# Altium PCB UIXO_sensor_shield.PcbDoc
Units mil, origin at the board's own origin, x right, y up, seen from the top; angles counter-clockwise.
Board outline 6000 x 4000 mil, 2 copper layers (Top Layer, Bottom Layer); 36 components, 25 nets, 112 pads, 24 vias.
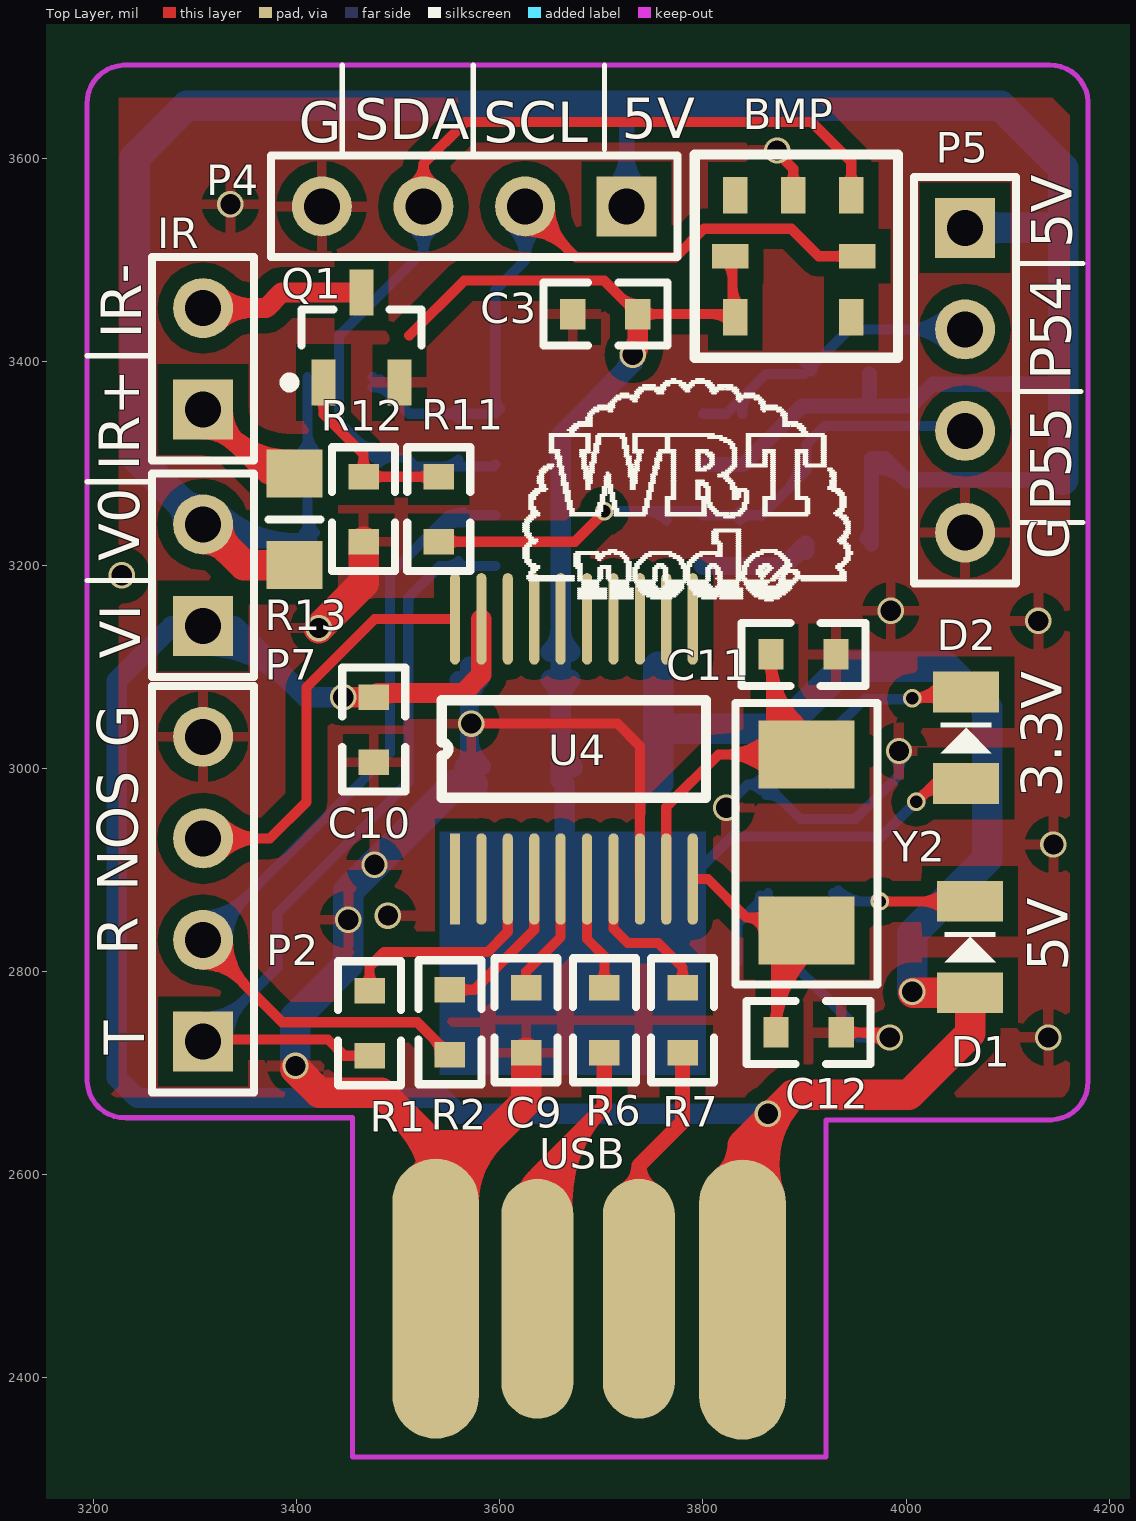
[diagram p0: Top Layer view]
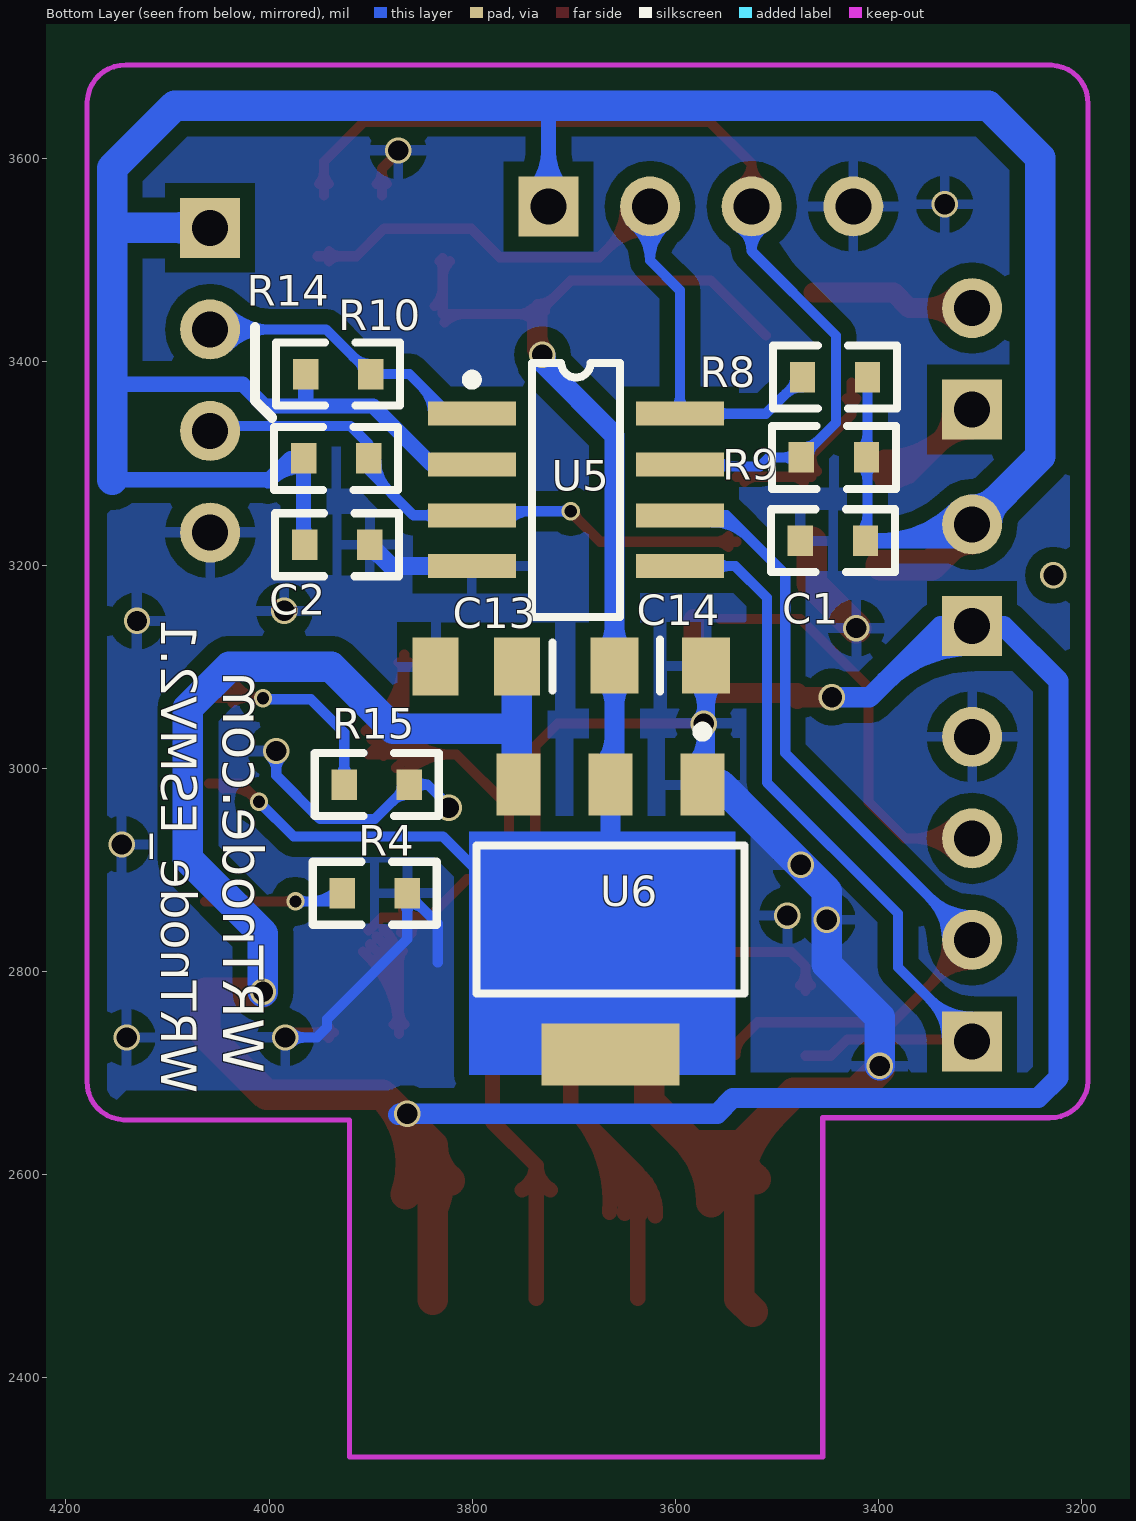
[diagram p1: Bottom Layer view, seen from below]
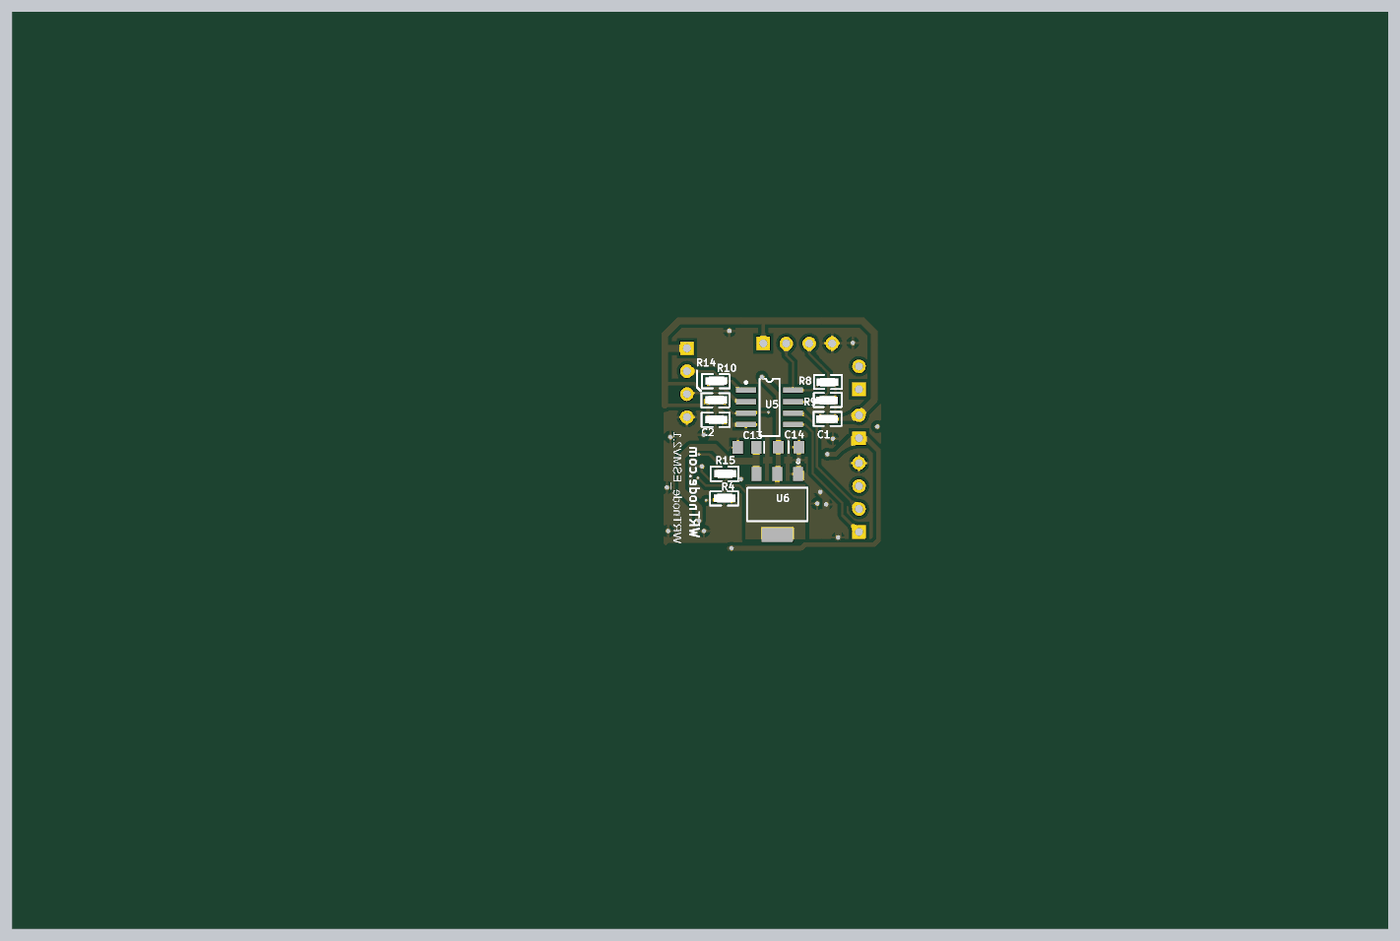
[diagram p2: 3D render of the assembled board from below, using the file's embedded part models]

## Layer stack, top to bottom
Top Layer: signal copper 1.4
Dielectric: dielectric 12.6, FR-4, Dk 4.8
Bottom Layer: signal copper 1.4

## Board outline
1000,1000 7000,1000 7000,5000 1000,5000

## Design rules (kind name [scope] priority, off if disabled: settings)
Clearance [All] p1: gap=15
PolygonConnect [All] p1: connectstyle=Relief reliefconductorwidth=10 reliefentries=4 polygonreliefangle="90 Angle"
RoutingVias [All] p1: holewidth=20 width=30 viastyle="Through Hole" minholewidth=10 minwidth=10 maxholewidth=30 maxwidth=50
SilkscreenOverComponentPads [All] p1: minsilkscreentomaskgap=10
SolderMaskExpansion [All] p1: expansion=4
Width [All] p1: maxlimit=59 minlimit=2 preferedwidth=10
27 further rules are at their usual default settings.

## Components (designator, comment, footprint, x,y, rotation, side; value= is the part's Value field where it differs from the comment)
BMP "BMP180" BMP180 3832,3564 r0 top
C1 "Cap" C0603 3450,3228 r180 bottom
C2 "Cap" C0603 3928,3216 r0 bottom
C3 "Cap" C0603 3699,3451 r0 top
C9 "Cap" C0603 3622,2747 r90 top
C10 "Cap" C0603 3472,3033 r90 top
C11 "Cap" C0603 3904,3108 r180 top
C12 "Cap" C0603 3909,2736 r180 top
C13 "Cap" CAP0805(2512) 3796,3100 r0 bottom
C14 "Cap" RES0805(2012M) 3615,3101 r180 bottom
D1 "LED" LED_0805 4063,2824 r270 top
D2 "LED" LED_0805 4059,3030 r270 top
IR "IRLED" HDR1X2 3308,3353 r90 top
P2 "Header 4" HDR1X4 3308,2731 r90 top
P4 "IIC" HDR1X4 3725,3553 r180 top
P5 "DHT11" HDR1X4 4058,3532 r270 top
P7 "Header 2" HDR1X2 3308,3140 r90 top
Q1 "NPN" SOT95P240-3N 3464,3424 r90 top
R1 "Res Semi" C0603 3468,2744 r90 top
R2 "Res Semi" C0603 3547,2745 r90 top
R4 "Res Semi" C0603 3891,2873 r0 bottom
R6 "Res Semi" C0603 3699,2747 r90 top
R7 "Res Semi" C0603 3776,2747 r90 top
R8 "Res1" C0603 3448,3389 r180 bottom
R9 "Res1" C0603 3449,3310 r180 bottom
R10 "Res1" C0603 3927,3384 r0 bottom
R11 "Res1" C0603 3544,3260 r270 top
R12 "Res1" C0603 3470,3260 r270 top
R13 "Res1" RES0805(2012M) 3398,3245 r90 top
R14 "Res1" C0603 3929,3301 r0 bottom
R15 "Res Semi" C0603 3889,2980 r0 bottom
U4 "CH340T" SOP20 3556,2891 r90 top
U5 "STC15W204S" SOP8 3698,3274 r270 bottom
U6 "REG1117-3.3" ZZ311 3664,2851 r0 bottom
USB "USB" USB-JSZ 3777,2478 r180 top
Y2 "XTAL" XTAL-5032 3901,2930 r270 top

## Footprints (in the part's own frame and the unit in brackets; to place one, negate y for a bottom-side part, rotate by r counter-clockwise, add the part's x,y. Pads: shape width x height; smd on the part's side, far side on the other; paste and mask are expansions set on the pad)
BMP180 [mil]
  rect 24x36 smd: 1(0,0) 3(0,-120) 4(114,-120) 6(114,0) 7(57,0)
  rect 36x24 smd: 2(-5,-60) 5(120,-60)
  silkscreen extent -40,-160 160,40
C0603 [mil]
  rect 25x30 smd: 1(-27,-4) 2(37,-4)
  silkscreen extent -56,-35 66,27, body extent -45,-24 49,13, height 30
CAP0805(2512) [mm]
  rect 1.15x1.45 smd: 1(-1.016,0) 2(1.016,0)
  silkscreen extent -1.9,-0.6 -1.9,0.6, body extent -1.07,-0.7 1.07,0.7, height 1.1
HDR1X2 [mm] "Connector; Header; 2 Position"
  rect 1.5x1.5 hole 0.9: 1(0,0)
  round 1.5 hole 0.9: 2(2.54,0)
  silkscreen extent -1.27,-1.27 3.81,1.27
HDR1X4 [mm] "Connector; Header; 4 Position"
  rect 1.5x1.5 hole 0.9: 1(0,0)
  round 1.5 hole 0.9: 2(2.54,0) 3(5.08,0) 4(7.62,0)
  silkscreen extent -1.27,-1.27 8.89,1.27
LED_0805 [mil]
  rect 40x65 smd: 1(45,0) 2(-45,0)
  silkscreen extent -15,-25 15,25, body extent -45,-34 45,34, height 60
RES0805(2012M) [mm]
  rect 1.2x1.4 smd: 1(-1.143,0) 2(1.143,0)
  silkscreen extent 0,-0.65 0,0.65, body extent -1.07,-0.7 1.07,0.7, height 0.65
SOP8 [mm] "Small Outline; 8 Leads; Body Width 4.3 mm; Pitch 1.27 mm"
  rect 0.6x2.2 smd: 1(-1.905,-2.6) 2(-0.635,-2.6) 3(0.635,-2.6) 4(1.905,-2.6) 5(1.905,2.6) 6(0.635,2.6) 7(-0.635,2.6) 8(-1.905,2.6)
  silkscreen extent -3.18,-2.72 3.18,1.1
SOP20 [mil]
  rect 90x10 smd: 1(0,0)
  oval 90x10 smd: 2(0,-26) 3(0,-52) 4(0,-78) 5(0,-104) 6(0,-130) 7(0,-156) 8(0,-182) 9(0,-208) 10(0,-234) 11(256,-234) 12(256,-208) 13(256,-182) 14(256,-156) 15(256,-130) 16(256,-104) 17(256,-78) 18(256,-52) 19(256,-26) 20(256,0)
  silkscreen extent 80,-247 176,13
SOT95P240-3N [mm] "SOT23, 3-Leads, Body 2.9x1.3mm, Pitch 0.95mm, Lead Span 2.4mm, IPC Medium Density"
  rect 1.15x0.6 smd: 1(-1.125,0.95) 2(-1.125,-0.95) 3(1.125,0)
  silkscreen extent -1.25,-1.5 0.7,1.92, body extent -0.7,-1.5 0.7,1.5, height 1.14
USB-JSZ [mm]
  oval 2.17x7 smd: 1(-1.575,0.025) 4(6.096,0)
  oval 1.8x6 smd: 2(1.016,0) 3(3.556,0)
XTAL-5032 [mm]
  rect 1.7x2.4 smd: 1(-2.124,0.025) 2(2.276,0.025)
  silkscreen extent -3.4,-1.75 3.63,1.8, body extent -2.42,-1.45 2.58,1.55, height 1.5
ZZ311 [mm] "SOT-223/SC-73; 4 Leads; Body 6.7 x 7.3 mm, inc. leads (LxW max)"
  rect 1.1x1.55 smd: 1(-2.3,-3.375) 2(0,-3.375) 3(2.3,-3.375)
  rect 3.45x1.55 smd: 4(0,3.375)
  silkscreen extent -3.35,-4.82 3.35,1.85

## Part data
BMP: library part "Header 7", "Header, 7-Pin"
C1 C2 C3 C9 C10 C11 C12 C13 C14: "Capacitor"
D1 D2: library part LED3, "Typical BLUE SiC LED"
IR: library part "Header 2", "Header, 2-Pin"
P2: "Header, 4-Pin"
P4 P5: library part "Header 4", "Header, 4-Pin"
P7: "Header, 2-Pin"
Q1: "NPN Bipolar Transistor"
R1 R2 R4 R6 R7 R15: "Semiconductor Resistor"
R8 R9 R10 R11 R12 R13 R14: "Resistor"
U4: library part CH340
U5: library part stc15f204s_sop8
U6: "800mA and 1A Low Dropout Positive Regulator 2.85V, 3.3V, 5V, and Adjustable"
Y2: "Crystal Oscillator"

## Via types
v1: diameter 26, hole 20, Top Layer to Bottom Layer, tented both sides, 20 vias
v2: diameter 18, hole 12, Top Layer to Bottom Layer, tented both sides, 4 vias

## Nets (pads, with @x,y where several pads share a name; then routed paths per layer and width w, separated by ;. In a path a pad name is that pad's centre, name@x,y a point inside that pad or via, vN(x,y) a via of type N, cw(c..) or ccw(c..) an arc to the next point about the centre after c; other vN are vias at no path point)
D3.3V: BMP.2 BMP.3 C3.2 C14.1 D2.1 U6.2 U6.4 | length 1938.6
  Top Layer w10: 3511,3426 3565,3480 3703,3480 C3.2 3829,3447 BMP.2@3829,3502 ; 3718.93,3464.07 ccw(c3736,3481.14) C3.2@3736,3457 ; C3.2@3724.96,3458.04 cw(c3716.43,3449.5) C3.2@3728.5,3449.5 ; v1(3731,3407) v1@3736,3412 ; C3.2@3741.3,3441.7 cw(c3754.11,3428.89) 3754.11,3447 cw(c3754.11,3465.11) C3.2@3741.3,3452.3 ; 3807.86,3447 cw(c3807.86,3419.86) BMP.3@3827.05,3439.05 ; BMP.2@3822.05,3499.05 cw(c3805.27,3482.27) 3829,3482.27 ; 3829,3474.14 ccw(c3856.14,3474.14) BMP.3@3836.95,3454.95 ; 3829,3491.93 cw(c3839.07,3491.93) BMP.2@3831.95,3499.05 ; v2(4010,2967) 4028,2985 D2.1 ; v2@4010,2971 ccw(c4010,2980.66) 4016.83,2973.83 ccw(c4023.66,2967) v2@4014,2967 ; v2@4013.75,2970.75 cw(c4038.2,2946.29) D2.1@4045.45,2980.11
  Top Layer w20: v1@3728.88,3409.12 ccw(c3711.69,3426.31) 3736,3426.31 ; v1@3736,3412 C3.2
  Bottom Layer w10: 3664,2902 3798,2902 3829,2933 3976,2933 v2(4010,2967)
  Bottom Layer w20: C14.1@3650.37,3087.43 cw(c3627.11,3064.18) 3660,3064.18 cw(c3692.89,3064.18) C14.1@3669.63,3087.43 ; C14.1@3650.37,3114.57 ccw(c3627.11,3137.82) 3660,3137.82 ccw(c3692.89,3137.82) C14.1@3669.63,3114.57 ; U6.2@3660,2987.87 C14.1 3660,3328 v1@3731,3399 ; 3660,3030.52 ccw(c3701.79,3030.52) U6.2@3672.24,3000.97 ; U6.4 3664,2902 U6.2 ; 3720.22,3388.22 ccw(c3701.44,3407) v1@3728,3407
D+: R6.2 U4.6 | length 142.5
  Top Layer w10: U4.6 3686,2832 3703,2815 R6.2 ; R6.2@3697.7,2789.3 ccw(c3684.89,2802.11) 3703,2802.11 ccw(c3721.11,2802.11) R6.2@3708.3,2789.3
D-: R7.2 U4.7 | length 181.2
  Top Layer w10: U4.7 3712,2842 3726,2828 3756,2828 3780,2804 R7.2 ; R7.2@3774.7,2789.3 ccw(c3761.89,2802.11) 3780,2802.11 ccw(c3798.11,2802.11) R7.2@3785.3,2789.3
DATA: P5.2 R10.1 U5.1 | length 498.3
  Bottom Layer w10: U5.1 3823,3349 3862,3388 R10.1 3944,3432 P5.2 ; U5.1@3838.67,3349 cw(c3876.5,3349) 3849.75,3375.75 ; R10.1@3900,3398 ccw(c3900,3422.14) 3917.07,3405.07 ; R10.1@3907.5,3390.5 cw(c3919.57,3390.5) R10.1@3911.04,3399.04 ; P5.2@4040.66,3414.66 ccw(c3998.79,3372.79) 3998.79,3432 ccw(c3998.79,3491.21) P5.2@4040.66,3449.34 ; P5.2@4047.73,3421.73 ccw(c4022.93,3396.93) 4022.93,3432 ccw(c4022.93,3467.07) P5.2@4047.73,3442.27
GND: BMP.7 C1.1 C2.1 C3.1 C9.1 C10.1 C11.1 C12.1 C13.2 C14.2 P2.4 P4.4 P5.4 Q1.2 R4.1 R12.2 R15.1 U4.8 U5.4 U6.1 USB.4 | length 2845.9
  Top Layer w10: v1@3566,3044 v1(3572,3044) 3716,3044 3738,3022 U4.8 ; v1@3873,3606 3889,3590 BMP.7 ; BMP.7@3884.05,3574.95 ccw(c3872.1,3586.9) 3889,3586.9 ccw(c3905.9,3586.9) BMP.7@3893.95,3574.95 ; C12.1 3979,2740 v1(3984,2735) ; C12.1@3941.3,2734.7 cw(c3954.11,2721.89) 3954.11,2740 cw(c3954.11,2758.11) C12.1@3941.3,2745.3 ; 3952.62,2740 cw(c3952.62,2703.62) v1@3978.34,2729.34
  Top Layer w30: v1@3399,2704 3422.5,2680.5 3483.5,2680.5 3537,2627 ; v1(3422,3138) 3466,3182 R12.2 ; 3505.49,2658.51 cw(c3423.75,2576.77) USB.4@3539.28,2573 ; USB.4@3520.87,2595.62 ccw(c3498.41,2627) 3537,2627 ; USB.4@3524,2465 USB.4 USB.4@3537,2583 ; USB.4@3537,2600.8 ccw(c3537,2643.76) 3567.38,2613.38 ; 3539.5,2629 3577,2629 ; USB.4@3553.13,2595.62 cw(c3575.59,2627) 3537,2627 ; USB.4@3564.72,2573.08 cw(c3655.58,2573.08) 3591.33,2637.33 ; C9.1 3626,2672 USB.4@3537,2583 ; USB.4@3537,2583 3537,2627
  Bottom Layer w10: v1@3823,2963 3844,2984 ; 3834,2809 3834,2847 R4.1 3864,2832 3943,2753 3943,2745 3953,2735 v1(3984,2735) ; 3846.93,2859.93 cw(c3864,2842.86) R4.1@3864,2867 ; R4.1@3852.96,2865.96 ccw(c3844.43,2874.5) R4.1@3856.5,2874.5 ; R15.1@3856.67,2978.72 ccw(c3844,2966.15) 3844,2984 ; R15.1@3856.67,2989.28 cw(c3844,3001.85) 3844,2984 ; R4.1@3858.7,2869.2 cw(c3845.89,2856.39) 3864,2856.39 cw(c3882.11,2856.39) R4.1@3869.3,2869.2 ; R15.1@3862,2974 cw(c3862,2949.86) 3879.07,2966.93 ; R15.1@3869.5,2981.5 ccw(c3881.57,2981.5) R15.1@3873.04,2972.96 ; v1@3978.34,2729.34 ccw(c3964.69,2715.69) 3964.69,2735 ccw(c3964.69,2754.31) v1@3978.34,2740.66 ; v1@3987.34,3011.34 cw(c3973.69,2997.69) 3993,2997.69 cw(c4012.31,2997.69) v1@3998.66,3011.34 ; v1(3993,3017) 3993,2992.99 3950.01,2950 3896,2950 R15.1 3844,2984
  Bottom Layer w18: C14.2@3559.66,3086.72 cw(c3534.7,3061.76) 3570,3061.76 cw(c3605.3,3061.76) C14.2@3580.34,3086.72 ; U6.1@3564.5,3001.68 ccw(c3551.23,3014.95) 3570,3014.95 ; 3570,3029.51 cw(c3586.49,3029.51) v1@3574.83,3041.17 ; v1@3570,3031.61 ccw(c3612.32,3031.61) U6.1@3582.4,3001.68 ; 3570,3058.49 ccw(c3586.49,3058.49) v1@3574.83,3046.83 ; C14.2 3570,2987.32 U6.1 ; U5.4 3880,3199 C2.1 ; C2.1@3890.76,3209.76 cw(c3901,3199.51) C2.1@3901,3214
  Bottom Layer w30: v1@3399,2707.5 3399,2755 3451,2807 3451,2879.11 3555.76,2983.87 U6.1
  other v1: 3399,2707 4140,2735 3451,2851 3490,2855 3476.81,2904.92 4145,2925 3823,2961 4130,3145 3985,3155 3335,3555 3873,3608
IR: P5.3 R11.2 R14.1 U5.3 | length 717.4
  Top Layer w10: R11.2 3674,3223 v2@3701,3250 ; R11.2@3547.8,3217.7 cw(c3560.61,3204.89) 3560.61,3223 cw(c3560.61,3241.11) R11.2@3547.8,3228.3 ; 3695.46,3244.46 ccw(c3686.93,3253) v2@3699,3253
  Bottom Layer w10: v2(3703,3253) 3796.36,3253 U5.3 3858,3249 3902,3293 R14.1 3902,3319 3920,3337 4053,3337 P5.3 ; v2@3705.83,3250.17 cw(c3712.66,3243.34) 3712.66,3253 cw(c3712.66,3262.66) v2@3705.83,3255.83 ; 3742.77,3253 cw(c3742.77,3222.9) U5.3@3764.05,3244.18 ; U5.3@3836.67,3244.18 cw(c3848.3,3232.56) 3848.3,3249 cw(c3848.3,3265.44) U5.3@3836.67,3253.82 ; 3882.48,3273.48 ccw(c3853.46,3302.5) R14.1@3894.5,3302.5
NetC9_2: C9.2 U4.5 | length 121.1
  Top Layer w10: C9.2 3626,2800 3660,2834 U4.5
NetC11_2: C11.2 U4.9 Y2.1 | length 844
  Top Layer w10: U4.9 3764,2962 3815.61,3013.61 Y2.1 3867,3048.61 C11.2 ccw(c3960.78,3111.99) Y2.1@3905.12,3036.52 ; C11.2@3861.7,3104.2 cw(c3848.89,3091.39) 3867,3091.39 cw(c3885.11,3091.39) C11.2@3872.3,3104.2 ; 3867,3052.59 ccw(c3916.97,3052.59) Y2.1@3887.31,3012.38 ; 3867,3072.39 ccw(c3931.57,3072.39) Y2.1@3893.24,3020.43 ; 3867,3092.19 ccw(c3946.18,3092.19) Y2.1@3899.18,3028.47 ; Y2.1@3868.09,2993.49 ccw(c3819.5,2944.89) 3819.5,3013.61 ccw(c3819.5,3082.33) Y2.1@3868.09,3033.74 ; Y2.1@3869.27,3046.34 cw(c3855.62,3032.69) Y2.1@3872.28,3022.94 ; Y2.1@3875.16,3000.56 ccw(c3843.64,2969.04) 3843.64,3013.61 ccw(c3843.64,3058.19) Y2.1@3875.16,3026.67
NetC12_2: C12.2 U4.10 Y2.2 | length 570
  Top Layer w10: U4.10 3805,2891 3843,2853 ; 3849.95,2853 ccw(c3849.95,2878.65) Y2.2@3868.09,2860.51 ; 3854.01,2853 cw(c3854.01,2837.1) Y2.2@3869.84,2838.62 ; Y2.2@3859.89,2837.66 ccw(c3843,2836.04) 3843,2853 ; C12.2@3866.7,2747.8 ccw(c3853.89,2760.61) 3872,2760.61 ccw(c3890.11,2760.61) C12.2@3877.3,2747.8 ; Y2.2@3868.09,2820.26 cw(c3858.66,2810.83) Y2.2@3872,2810.83 ; C12.2@3872,2738.7 cw(c3981.57,2738.7) Y2.2@3907.47,2819.42 ; C12.2 Y2.2@3872,2810.39 ; 3872,2761.46 cw(c3960.68,2761.46) Y2.2@3900.71,2826.78 ; 3872,2784.21 cw(c3939.79,2784.21) Y2.2@3893.94,2834.15 ; Y2.2@3872,2806.97 cw(c3918.9,2806.97) Y2.2@3887.18,2841.52 ; Y2.2 3889.39,2853 3843,2853
NetD1_2: D1.2 R4.2 | length 254.5
  Top Layer w10: v2(3974,2869) D1.2 ; v2@3976.83,2866.17 cw(c3983.66,2859.34) 3983.66,2869 cw(c3983.66,2878.66) v2@3976.83,2871.83 ; D1.2@4039.89,2858.39 ccw(c4014.29,2832.79) 4014.29,2869 ccw(c4014.29,2905.21) D1.2@4039.89,2879.61
  Bottom Layer w10: R4.2 3936,2869 v2(3974,2869) ; R4.2@3933.3,2879.8 ccw(c3959.38,2905.88) 3959.38,2869 ; v2@3971.17,2866.17 ccw(c3964.34,2859.34) 3964.34,2869 ccw(c3964.34,2878.66) v2@3971.17,2871.83
NetD2_2: D2.2 R15.2 | length 309.2
  Top Layer w10: v2@4008.83,3066.17 cw(c4015.66,3059.34) 4015.66,3069 cw(c4015.66,3078.66) v2@4008.83,3071.83 ; 4024.77,3069 cw(c4024.77,3053.27) D2.2@4035.89,3064.39 ; 4025.29,3069 ccw(c4025.29,3089.95) D2.2@4042.41,3077.88 ; D2.2@4034.24,3083.64 cw(c4006,3103.55) v2(4006,3069) 4053,3069 D2.2
  Bottom Layer w10: R15.2@3920.7,2991.8 ccw(c3907.89,3004.61) 3926,3004.61 ccw(c3944.11,3004.61) R15.2@3931.3,2991.8 ; R15.2 3926,3035 3959,3068 v2@4006,3068
NetIR_1: IR.1 R13.2 | length 291.3
  Top Layer w20: IR.1@3308,3333.47 cw(c3308,3286.33) 3341.34,3319.66 cw(c3374.67,3353) IR.1@3327.53,3353 ; IR.1 3371,3290 R13.2 ; IR.1@3331.44,3329.56 ccw(c3394.06,3392.19) R13.2@3394.06,3303.62 ; 3365.58,3295.42 ccw(c3394.06,3323.9) R13.2@3394.06,3283.62
NetIR_2: IR.2 Q1.3 | length 236.4
  Top Layer w20: IR.2 3370,3453 3385.29,3468.29 Q1.3 ; IR.2@3321.81,3439.19 cw(c3355.14,3405.86) 3355.14,3453 cw(c3355.14,3500.14) IR.2@3321.81,3466.81
NetP2_3: P2.3 U4.20 | length 551.8
  Top Layer w10: P2.3 3374,2931 3410,2967 3410,3080 3477,3147 U4.20 ; P2.3@3318.27,2920.73 cw(c3343.07,2895.93) 3343.07,2931 cw(c3343.07,2966.07) P2.3@3318.27,2941.27 ; P2.3@3325.34,2913.66 cw(c3367.21,2871.79) 3367.21,2931 cw(c3367.21,2990.21) P2.3@3325.34,2948.34
NetQ1_2: Q1.1 R11.1 R12.1 | length 294.2
  Top Layer w10: Q1.1@3421.78,3364.07 cw(c3410.16,3352.44) 3426.6,3352.44 cw(c3443.04,3352.44) Q1.1@3431.41,3364.07 ; Q1.1 3426.6,3348.4 3466,3309 R12.1 R11.1 ; R12.1@3460.7,3292.3 ccw(c3447.89,3305.11) 3466,3305.11 ccw(c3484.11,3305.11) R12.1@3471.3,3292.3 ; R12.1@3473.8,3281.7 cw(c3486.61,3268.89) 3486.61,3287 cw(c3486.61,3305.11) R12.1@3473.8,3292.3 ; R11.1@3532.2,3281.7 ccw(c3519.39,3268.89) 3519.39,3287 ccw(c3519.39,3305.11) R11.1@3532.2,3292.3
NetR1_2: R1.2 U4.3 | length 297.5
  Top Layer w10: R1.2@3466.7,2786.3 ccw(c3453.89,2799.11) 3472,2799.11 ccw(c3490.11,2799.11) R1.2@3477.3,2786.3 ; R1.2 3472,2805 3486,2819 3587.96,2819 3608,2839.04 U4.3 U4.3@3608,2848
NetR2_2: R2.2 U4.4 | length 185.9
  Top Layer w10: R2.2 3575,2782 3634,2841 U4.4 ; R2.2@3558.8,2776.7 cw(c3571.61,2763.89) 3571.61,2782 cw(c3571.61,2800.11) R2.2@3558.8,2787.3
NetR6_1: R6.1 USB.3 | length 620.5
  Top Layer w15: USB.3@3619.99,2559.27 cw(c3669.28,2563.34) 3634.31,2598.31 ; USB.3@3627.18,2586.83 ccw(c3621.86,2601) 3637,2601 ; USB.3@3634.94,2560.51 cw(c3711.58,2566.83) 3657.2,2621.2 ; USB.3 3637,2601 ; USB.3@3646.82,2586.83 cw(c3652.14,2601) 3637,2601 ; USB.3@3649.89,2561.74 cw(c3753.89,2570.31) 3680.1,2644.1 ; USB.3@3664.84,2562.97 cw(c3796.19,2573.8) 3703,2667 ; R6.1 3703,2667 ; 3637,2601 3703,2667
NetR7_1: R7.1 USB.2 | length 318.2
  Top Layer w15: USB.2@3723.06,2584.88 ccw(c3709.17,2609) 3737,2609 ; USB.2 3737,2609 ; USB.2@3750.94,2584.88 cw(c3764.83,2609) 3737,2609 ; R7.1 3780,2652 3737,2609
RXD: P2.2 R2.1 U5.6 | length 1237.6
  Top Layer w10: P2.2@3308,2806.47 cw(c3308,2754.5) 3344.75,2791.25 ; P2.2@3308,2816.47 cw(c3308,2788.64) 3327.68,2808.32 ; P2.2@3308,2828 3386,2750 3519,2750 R2.1 ; P2.2@3322.53,2831 ccw(c3364.84,2831) 3334.92,2801.08 ; P2.2@3332.53,2831 ccw(c3398.98,2831) 3351.99,2784.01 ; 3533.93,2735.07 cw(c3516.86,2718) R2.1@3541,2718 ; R2.1@3539.96,2729.04 ccw(c3548.5,2737.57) R2.1@3548.5,2725.5
  Bottom Layer w10: P2.2 3492,3015 3492,3191 3550,3249 U5.6 ; P2.2@3308,2845.53 ccw(c3308,2880.6) 3332.8,2855.8 ccw(c3357.6,2831) P2.2@3322.53,2831 ; P2.2@3308,2855.53 ccw(c3308,2914.74) 3349.87,2872.87 ccw(c3391.74,2831) P2.2@3332.53,2831 ; 3528.37,3227.37 cw(c3564.14,3191.6) U5.6@3564.14,3242.19 ; 3545.44,3244.44 cw(c3564.14,3225.75) U5.6@3564.14,3252.19
SCL: BMP.5 P4.2 R8.1 U5.8 | length 1101.2
  Top Layer w10: P4.2@3625,3528.47 cw(c3625,3469.26) 3666.87,3511.13 cw(c3708.74,3553) P4.2@3649.53,3553 ; P4.2@3625,3538.47 cw(c3625,3503.4) 3649.8,3528.2 cw(c3674.6,3553) P4.2@3639.53,3553 ; P4.2 3675,3503 3773,3503 3801,3531 3887,3531 3914,3504 BMP.5 ; BMP.5@3941.05,3499.05 ccw(c3929.1,3487.1) 3929.1,3504 ccw(c3929.1,3520.9) BMP.5@3941.05,3508.95
  Bottom Layer w10: R8.1@3475,3375 cw(c3475,3350.86) 3492.07,3367.93 ; R8.1 3511,3349 U5.8 3595.64,3470.64 3625,3500 ; R8.1@3482.5,3382.5 ccw(c3494.57,3382.5) R8.1@3486.04,3373.96 ; U5.8@3559.33,3344.18 ccw(c3547.7,3332.56) 3547.7,3349 ccw(c3547.7,3365.44) U5.8@3559.33,3353.82 ; U5.8@3590.82,3353.82 ccw(c3579.19,3365.44) 3595.64,3365.44 ccw(c3612.08,3365.44) U5.8@3600.45,3353.82 ; P4.2@3609.13,3534.3 cw(c3580.01,3500) 3625,3500 ; P4.2@3615.6,3541.93 cw(c3598.35,3521.61) 3625,3521.61 cw(c3651.65,3521.61) P4.2@3634.4,3541.93 ; P4.2 3625,3500 ; P4.2@3640.87,3534.3 ccw(c3669.99,3500) 3625,3500
SDA: BMP.6 P4.3 R9.1 U5.7 | length 1155.9
  Top Layer w10: P4.3@3512.95,3574.36 ccw(c3501.31,3595) 3525,3595 ; P4.3 3525,3595 ; P4.3@3537.05,3574.36 cw(c3548.69,3595) 3525,3595 ; BMP.6@3941.05,3574.95 ccw(c3929.1,3586.9) 3946,3586.9 ccw(c3962.9,3586.9) BMP.6@3950.95,3574.95 ; BMP.6 3946,3597 3907,3636 3566,3636 3525,3595
  Bottom Layer w10: 3458.93,3323.07 ccw(c3476,3340.14) R9.1@3476,3316 ; R9.1@3464.96,3317.04 cw(c3456.43,3308.5) R9.1@3468.5,3308.5 ; R9.1@3481.3,3300.7 cw(c3494.11,3287.89) 3494.11,3306 cw(c3494.11,3324.11) R9.1@3481.3,3311.3 ; P4.3@3512.1,3532.14 cw(c3497.8,3509) 3525,3509 ; P4.3 3525,3509 ; P4.3@3537.9,3532.14 ccw(c3552.2,3509) 3525,3509 ; 3542.87,3297 ccw(c3542.87,3320.27) U5.7@3559.33,3303.82 ; U5.7 3593.64,3297 3517,3297 3508,3306 R9.1 3442,3340 3442,3426 3525,3509
TXD: P2.1 R1.1 U5.5 | length 965.8
  Top Layer w10: P2.1@3308,2728 3313,2733 3431,2733 3447,2717 R1.1
  Bottom Layer w10: P2.1 3381,2804 3381,2857 3510,2986 3510,3168 3541,3199 U5.5 ; P2.1@3308,2745.53 ccw(c3308,2780.6) 3332.8,2755.8 ccw(c3357.6,2731) P2.1@3322.53,2731 ; P2.1@3308,2755.53 ccw(c3308,2814.74) 3349.87,2772.87 ccw(c3391.74,2731) P2.1@3332.53,2731 ; U5.5@3559.33,3194.18 ccw(c3547.7,3182.56) 3547.7,3199 ccw(c3547.7,3215.44) U5.5@3559.33,3203.82
VCC: C10.2 C13.1 D1.1 P7.1 U4.19 U6.3 USB.1 | length 3272.6
  Top Layer w20: v1(3446,3070) C10.2 3480,3074 3564,3074 3582,3092 U4.19 ; C10.2@3480.27,3068.23 cw(c3494.19,3054.31) 3494.19,3074
  Top Layer w30: USB.1@3821.91,2593.9 ccw(c3794.42,2629) 3839,2629 ; USB.1@3836.83,2571.36 cw(c3904.44,2593.73) 3854.09,2644.09 ; USB.1 3839,2629 ; USB.1@3856.09,2593.9 cw(c3883.58,2629) 3839,2629 ; USB.1@3865.31,2580.78 cw(c3956.16,2610.84) 3888.5,2678.5 ; v1@4007,2779 D1.1 4063,2739 4002.5,2678.5 3888.5,2678.5 ; 3839,2629 3888.5,2678.5
  Bottom Layer w20: P7.1@3308,3120.47 cw(c3308,2998.49) 3394.26,3084.74 ; P7.1@3308,3140.47 cw(c3308,3066.77) 3360.11,3118.89 ; v1(3446,3070) 3409,3070 3339,3140 P7.1 3277,3140 3223,3086 3223,2695.5 3243,2675.5 3543.5,2675.5 3559,2660 v1(3864,2660) 3872,2660 v1@3873,2659
  Bottom Layer w30: U6.3@3756,2985.32 3756,3039 ; C13.1 3756,3039 ; v1(4006,2780) 4006,2837 4080,2911 4080,3059 4039,3100 3939,3100 3878,3039 3756,3039
VCC5: C1.2 C2.2 P4.1 P5.1 P7.2 R8.2 R9.2 R10.2 R13.1 R14.2 U5.2 | length 3450.5
  Top Layer w30: P7.2@3308,3225.47 cw(c3308,3190.4) 3332.8,3215.2 cw(c3357.6,3240) P7.2@3322.53,3240 ; P7.2 3348,3200 R13.1
  Bottom Layer w10: R9.2@3406.7,3298.2 cw(c3396.31,3287.81) 3411,3287.81 ; R9.2@3406.7,3313.8 ccw(c3396.31,3324.19) 3411,3324.19 ; C1.2@3407.7,3231.8 ccw(c3399.72,3239.78) 3411,3239.78 ; C1.2@3411,3226 R8.2 ; 3411,3249.43 ccw(c3435.93,3249.43) C1.2@3418.3,3231.8 ; 3411,3282.98 cw(c3432.52,3282.98) R9.2@3417.3,3298.2 ; 3411,3329.02 ccw(c3432.52,3329.02) R9.2@3417.3,3313.8
  Bottom Layer w15: P7.2 3324,3224 C1.2 ; P7.2@3312.97,3244.97 ccw(c3363.59,3295.59) 3363.59,3224 ; P7.2@3323.58,3255.58 ccw(c3399.81,3331.81) 3399.81,3224 ; P4.1@3709.42,3568.58 ccw(c3671.82,3606.18) 3725,3606.18 ccw(c3778.18,3606.18) P4.1@3740.58,3568.58 ; P4.1 3725,3652 ; U5.2 3840,3299 3897.5,3356.5 3964,3356.5 ; C2.2@3961.46,3226.04 ccw(c3950.51,3236.99) 3966,3236.99 ; R10.2 3964,3356.5 ; C2.2@3966,3221 R14.2 3979,3305 4000,3284 4153.5,3284 ; R14.2@3966,3297.5 cw(c3966,3248.01) 4001,3283 ; 4154.5,3380 4152.5,3378 4026,3378 4004.5,3356.5 3964,3356.5
  Bottom Layer w30: P7.2@3293.47,3240 ccw(c3258.4,3240) 3283.2,3264.8 ccw(c3308,3289.6) P7.2@3308,3254.53 ; P7.2 3241,3307 3241,3601 3292,3652 3725,3652 4093,3652 4154.5,3590.5 4154.5,3380 4154.5,3284 ; P5.1 4151.5,3532 ; P5.1@4068.27,3521.73 cw(c4093.07,3496.93) 4093.07,3532 cw(c4093.07,3567.07) P5.1@4068.27,3542.27
pads on no net: BMP.1 BMP.4 U4.1 U4.2 U4.11 U4.12 U4.13 U4.14 U4.15 U4.16 U4.17 U4.18
copper on no net:
  other v1: 3228,3190

## Polygon pours and split planes (outlines as drawn)
GND on Bottom Layer "Bottom Layer-No Net" (solid, pour order 1000): 3205.47,3674.26 3205.47,2683.26 4140.47,2683.26 4152.47,2671.26 4159.47,2678.26 4159.47,3674.26 3218.47,3674.26 3215.47,3671.26
GND on Top Layer "Bottom Layer-No Net" (solid, pour order 1001): 3217,2679 3220,2676 4162,2676 4162,3642 4144,3660 3225,3660 3225,2687 3217,2679

## Keep-outs
Keep-Out Layer:
  lines w5: 3232,2656 cw(c3231,2693) 3194,2692 3194,3654 cw(c3231,3655) 3230,3692 4141,3692 cw(c4142,3655) 4179,3656 4179,2692 cw(c4142,2691) 4143,2654 3921,2654 3921,2322.11 3455,2322.11 3455,2656 3233,2656

## Other copper
Bottom Layer:
  rectangle: 3541,2698 3803,2938

## Silkscreen, mask and mechanical layers (free items; w line width, h text height)
Top Overlay:
  drawing of 862 lines, arcs and shapes, not listed
  text "5V" at 3720,3620 h40
  text "SDA" at 3457,3619 h40
  text "G" at 3402,3616 h40
  text "SCL" at 3584,3616 h40
  text "5V" at 4163,3512 h40 r90
  text "IR-" at 3247,3423 h40 r90
  text "P54" at 4162,3382 h40 r90
  text "IR+" at 3245,3293 h40 r90
  text "P55" at 4162,3253 h40 r90
  text "G" at 4160,3205 h40 r90
  text "V0" at 3245,3204 h40 r90
  text "VI" at 3246,3108 h40 r90
  text "G" at 3244,3020 h40 r90
  text "3.3V" at 4153,2971 h40 r90
  text "NOS" at 3244,2879 h40 r90
  text "R" at 3244,2816 h40 r90
  text "5V" at 4159,2800 h40 r90
  text "T" at 3250,2718 h40 r90
Bottom Overlay:
  lines w10: 3997,3345 4014,3362 4014,3434
  text "WRTnode.com" at 4045,2700 h40 r90
  text "WRTnode_ESMV2.1" at 4118,2680 h60 r90